# Altium PCB PT2272.PcbDoc
Units mil, origin at the board's own origin, x right, y up, seen from the top; angles counter-clockwise.
Board outline 6000 x 4000 mil, 2 copper layers (Top Layer, Bottom Layer); 19 components, 18 nets, 55 pads, 0 vias.
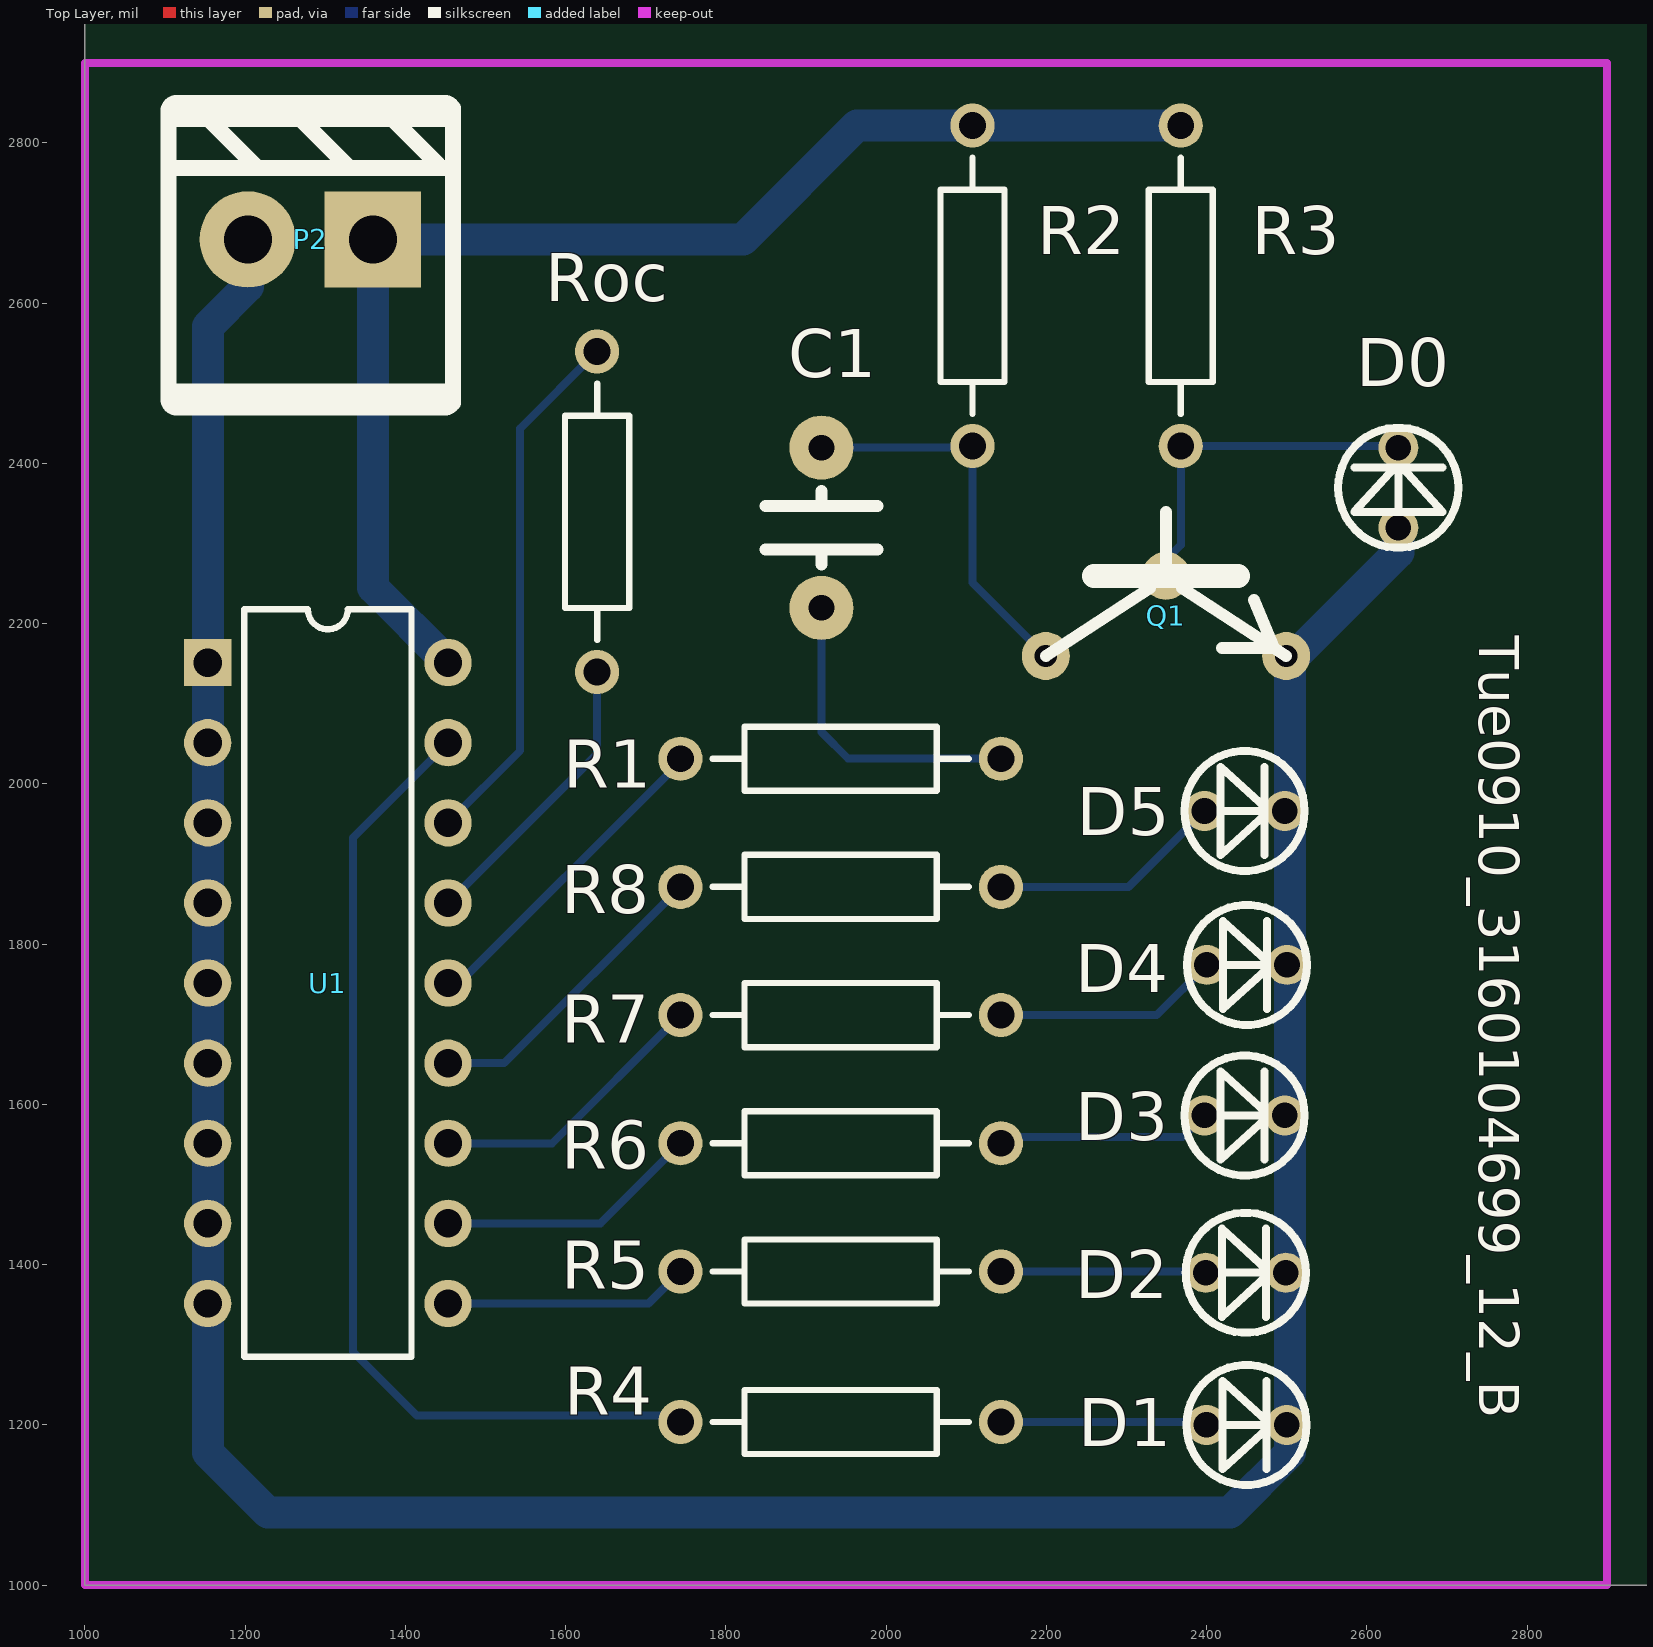
[diagram p0: Top Layer view]
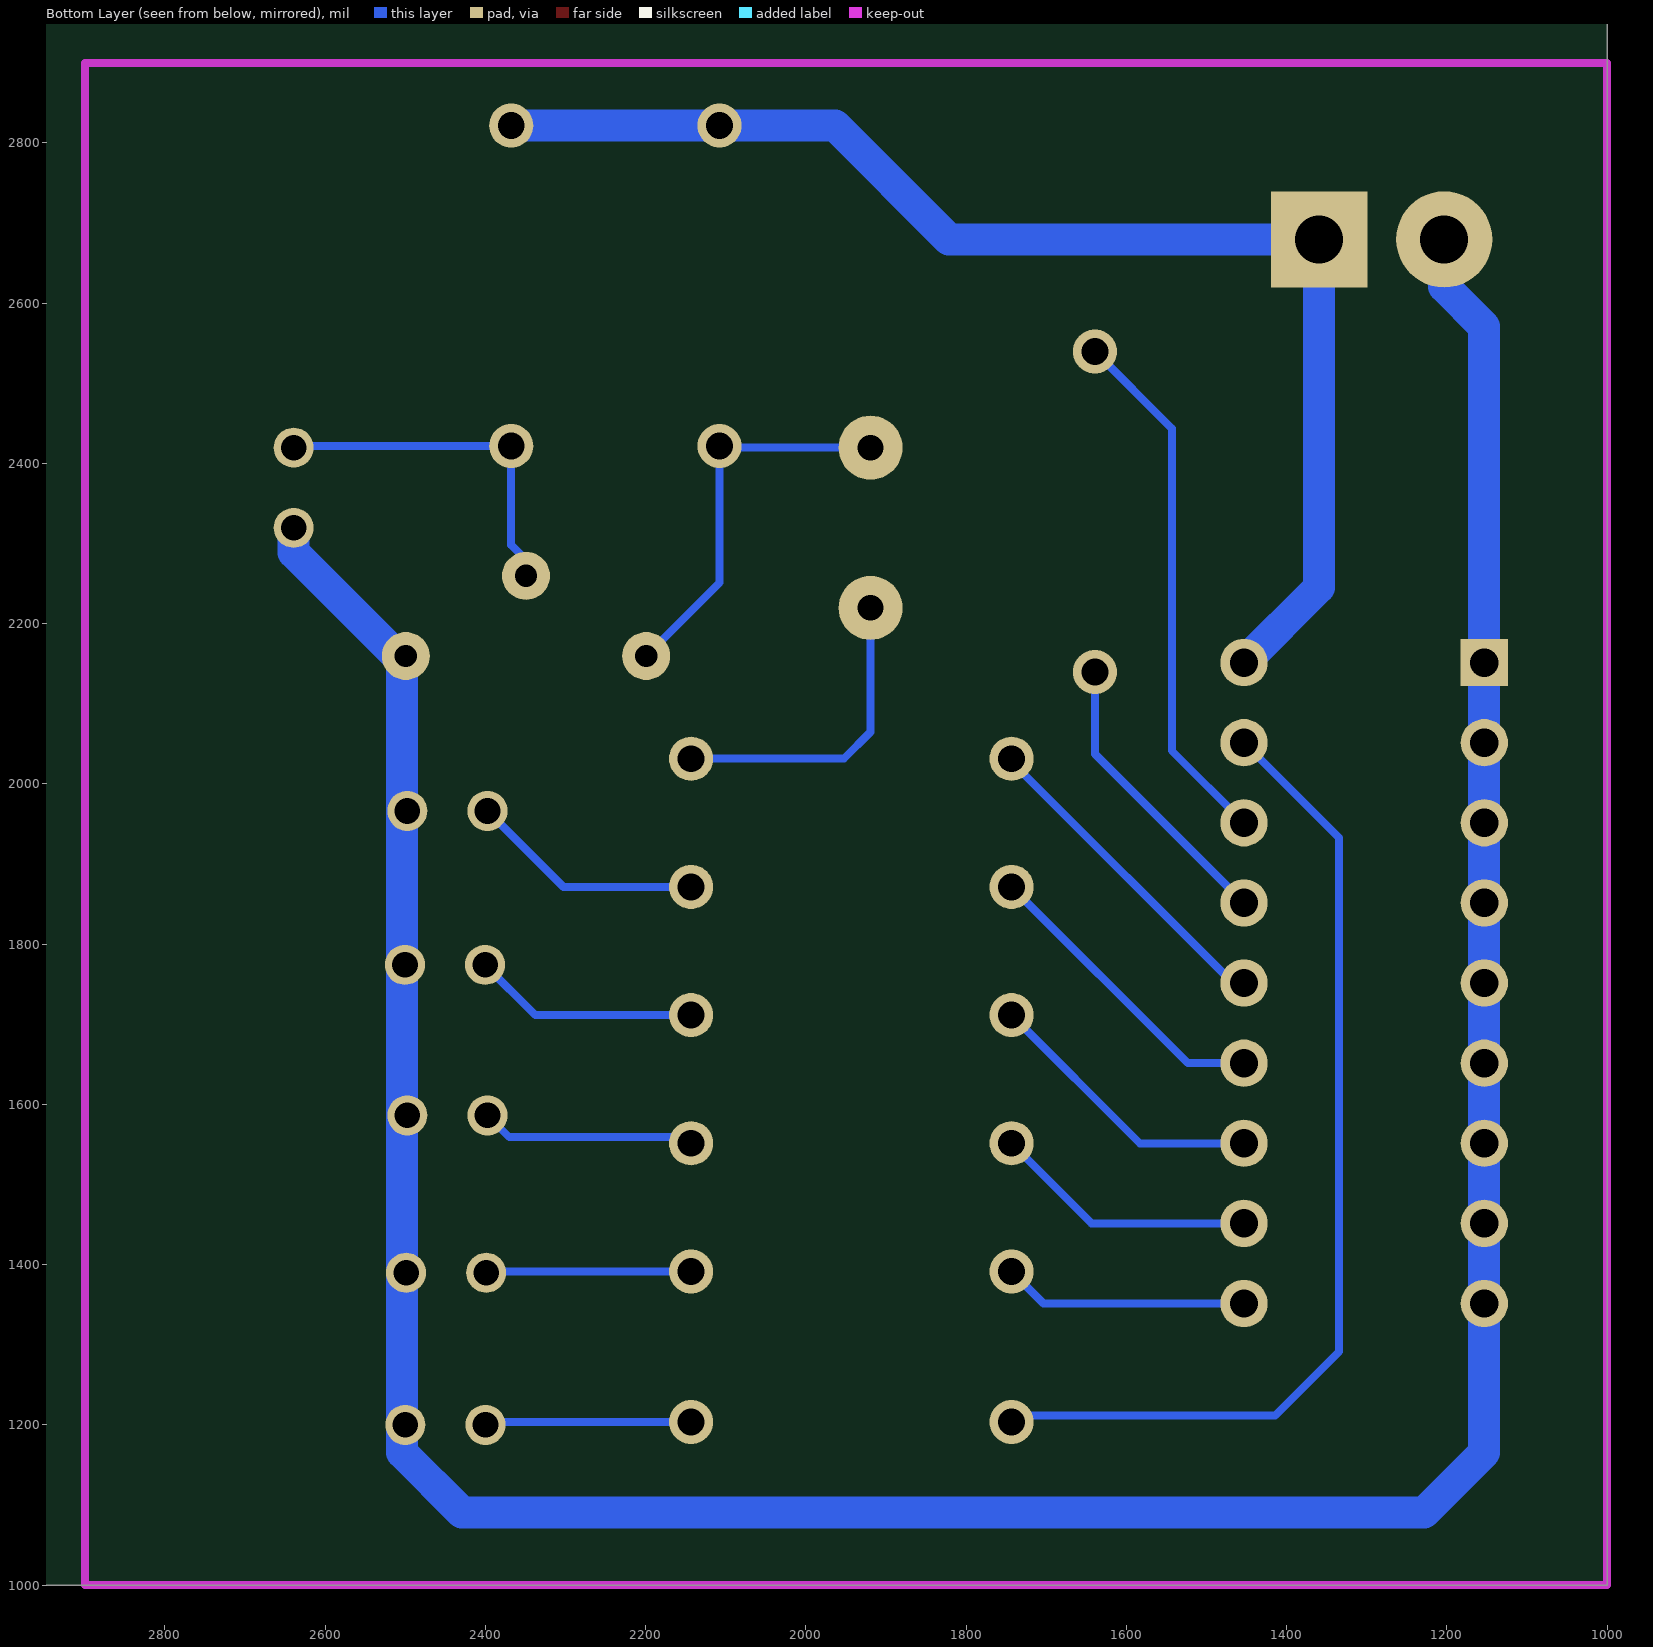
[diagram p1: Bottom Layer view, seen from below]

## Layer stack, top to bottom
Top Layer: signal copper 1.4
Dielectric: dielectric 12.6, FR-4, Dk 4.8
Bottom Layer: signal copper 1.4

## Board outline
1000,1000 7000,1000 7000,5000 1000,5000

## Design rules (kind name [scope] priority, off if disabled: settings)
Clearance [All] p1: gap=10
ComponentClearance [All] p1: gap=10 collisioncheckmode=3 verticalgap=10 showdistances=TRUE
PolygonConnect [All] p1: connectstyle=Relief reliefconductorwidth=10 reliefentries=4 polygonreliefangle="90 Angle"
RoutingVias [All] p1: holewidth=28 width=50 viastyle="Through Hole" minholewidth=28 minwidth=50 maxholewidth=28 maxwidth=50
SilkscreenOverComponentPads [All] p1: minsilkscreentomaskgap=10
SolderMaskExpansion [All] p1: expansion=4
TestPointUsage [All] p1: valid=0 allowmultiple=FALSE
Testpoint [All] p1: side=15 testpointundercomponent=TRUE minsize=40 maxsize=100 preferedsize=60 minholesize=0 maxholesize=40 preferedholesize=32 testpointgrid=1 style=1023 order=0-112345678
Width [All] p1: maxlimit=100 minlimit=10 preferedwidth=10
22 further rules are at their usual default settings.

## Components (designator, comment, footprint, x,y, rotation, side; value= is the part's Value field where it differs from the comment)
C1 "Cap" CAP0.2 1919.37,2219.69 r180 top
D0 "" LEDLXH-3 2639.37,2319.69 r180 top
D1 "LED" LEDLXH-3 2400,1200 r90 top
D2 "" LEDLXH-3 2399.05,1389.92 r90 top
D3 "" LEDLXH-3 2397.48,1586.3 r90 top
D4 "" LEDLXH-3 2400.47,1774.17 r90 top
D5 "" LEDLXH-3 2397.48,1966.3 r90 top
P2 "Header 2" "POWER PLUG2" 1359.37,2679.69 r0 top
Q1 "S8050" NPN-2 2499.37,2159.69 r270 top
R1 "Res2" AXIAL-0.4 1943.31,2031.5 r0 top
R2 "Res2" AXIAL-0.4 2107.87,2621.73 r90 top
R3 "Res2" AXIAL-0.4 2367.87,2621.73 r90 top
R4 "Res2" AXIAL-0.4 1943.31,1203.62 r180 top
R5 "Res2" AXIAL-0.4 1943.31,1391.5 r180 top
R6 "Res2" AXIAL-0.4 1943.31,1551.5 r180 top
R7 "Res2" AXIAL-0.4 1943.31,1711.5 r180 top
R8 "Res2" AXIAL-0.4 1943.31,1871.5 r180 top
Roc "Res2" AXIAL-0.4 1639.37,2339.69 r90 top
U1 "PT2272" DIP-18 1303.31,1751.5 r270 top

## Footprints (in the part's own frame and the unit in brackets; to place one, negate y for a bottom-side part, rotate by r counter-clockwise, add the part's x,y. Pads: shape width x height; smd on the part's side, far side on the other; paste and mask are expansions set on the pad)
AXIAL-0.4 [mm] "Resistor; 2 Leads"
  round 1.4 hole 0.85: 1(-5.08,0) 2(5.08,0)
  silkscreen extent -4.06,-1.02 4.06,1.02
CAP0.2 [mil]
  round 80 hole 32: 1(0,0) 2(0,-200)
  silkscreen extent -70,-146 70,-54
DIP-18 [mm] "DIP; 18 Leads; Row Spacing 7.62 mm; Pitch 2.54 mm"
  rect 1.5x1.5 hole 0.9: 1(-10.16,-3.81)
  round 1.5 hole 0.9: 2(-7.62,-3.81) 3(-5.08,-3.81) 4(-2.54,-3.81) 5(0,-3.81) 6(2.54,-3.81) 7(5.08,-3.81) 8(7.62,-3.81) 9(10.16,-3.81) 10(10.16,3.81) 11(7.62,3.81) 12(5.08,3.81) 13(2.54,3.81) 14(0,3.81) 15(-2.54,3.81) 16(-5.08,3.81) 17(-7.62,3.81) 18(-10.16,3.81)
  silkscreen extent -11.85,-2.65 11.85,2.65
LEDLXH-3 [mil]
  round 50 hole 32: 1(0,0) 2(0,-100)
  silkscreen extent -75,-125 75,25
NPN-2 [mil]
  round 60 hole 28: 1(0,0) 2(-100,-150) 3(0,-300)
  silkscreen extent -180,-300 0,0
"POWER PLUG2" [mil]
  rect 120x120 hole 60: 1(0,0)
  round 120 hole 60: 2(-156,0)
  silkscreen extent -255,-204 100,164

## Part data
C1: "Capacitor"
D0 D1 D2 D3 D4 D5: library part LED0, "Typical INFRARED GaAs LED"
P2: "Header, 2-Pin"
Q1: library part 2N3904, "NPN General Purpose Amplifier"
R1 R2 R3 R4 R5 R6 R7 R8 Roc: "Resistor"

## Nets (pads, with @x,y where several pads share a name; then routed paths per layer and width w, separated by ;. In a path a pad name is that pad's centre, name@x,y a point inside that pad or via, vN(x,y) a via of type N, cw(c..) or ccw(c..) an arc to the next point about the centre after c; other vN are vias at no path point)
GND: D0.1 D1.2 D2.2 D3.2 D4.2 D5.2 P2.2 Q1.1 U1.1 U1.2 U1.3 U1.4 U1.5 U1.6 U1.7 U1.8 U1.9 | length 4108
  Bottom Layer w40: P2.2@1203.37,2629.92 1203.37,2620.69 1153.54,2570.87 1153.54,1165.35 1228.35,1090.55 2429.13,1090.55 2503.94,1165.35 2503.94,2153.54 2639.37,2288.98 D0.1
NetC1_1: C1.1 R1.2 | length 392.6
  Bottom Layer w10: C1.1 1919.37,2064.88 1952.76,2031.5 R1.2
NetC1_2: C1.2 Q1.3 R2.1 | length 489.3
  Bottom Layer w10: C1.2 2105.83,2419.69 R2.1 2107.87,2251.18 Q1.3
NetD0_2: D0.2 Q1.2 R3.1 | length 441.2
  Bottom Layer w10: Q1.2 2349.37,2279.69 2367.87,2298.19 R3.1 D0.2@2639.37,2421.73
NetD1_1: D1.1 R4.1 | length 240
  Bottom Layer w10: R4.1 D1.1@2383.31,1203.62
NetD2_1: D2.1 R5.1 | length 256.4
  Bottom Layer w10: R5.1 2397.48,1391.5 D2.1
NetD3_1: D3.1 R6.1 | length 268.6
  Bottom Layer w10: R6.1 2150.87,1559.06 2370.24,1559.06 D3.1
NetD4_1: D4.1 R7.1 | length 283.1
  Bottom Layer w10: R7.1 2337.8,1711.5 D4.1
NetD5_1: D5.1 R8.1 | length 293.4
  Bottom Layer w10: R8.1 2302.68,1871.5 D5.1
NetR1_1: R1.1 U1.14 | length 404
  Bottom Layer w10: U1.14 1467.01,1751.5 1733.31,2017.8 R1.1@1733.31,2031.5
NetR4_2: R4.2 U1.17 | length 1251
  Bottom Layer w10: U1.17 1334.65,1932.83 1334.65,1291.34 1414.49,1211.5 R4.2@1743.31,1211.5
NetR5_2: R5.2 U1.10 | length 306.6
  Bottom Layer w10: U1.10 1703.31,1351.5 R5.2
NetR6_2: R6.2 U1.11 | length 331.4
  Bottom Layer w10: U1.11 1643.31,1451.5 R6.2
NetR7_2: R7.2 U1.12 | length 356.3
  Bottom Layer w10: U1.12 1583.31,1551.5 R7.2
NetR8_2: R8.2 U1.13 | length 381.1
  Bottom Layer w10: U1.13 1523.31,1651.5 R8.2
NetRoc_1: Roc.1 U1.15 | length 368.6
  Bottom Layer w10: U1.15@1453.31,1854.88 U1.15 1639.37,2037.56 Roc.1
NetRoc_2: Roc.2 U1.16 | length 667.1
  Bottom Layer w10: U1.16@1453.31,1953.31 U1.16 1543.31,2041.5 1543.31,2443.62 Roc.2
VCC: P2.1 R2.2 R3.2 U1.18 | length 1634.4
  Bottom Layer w40: U1.18 1359.37,2245.43 P2.1 1821.42,2679.69 1963.46,2821.73 R3.2

## Keep-outs
Keep-Out Layer:
  lines w10: 2897.64,1000 1000,1000 1000,2900 2900,2900 2900,1000

## Silkscreen, mask and mechanical layers (free items; w line width, h text height)
Top Overlay:
  text "Tue0910_3160104699_12_B" at 2740.16,2185.04 h50 r270